# EAGLE board lightswitchboard (EAGLE 9.2.0)
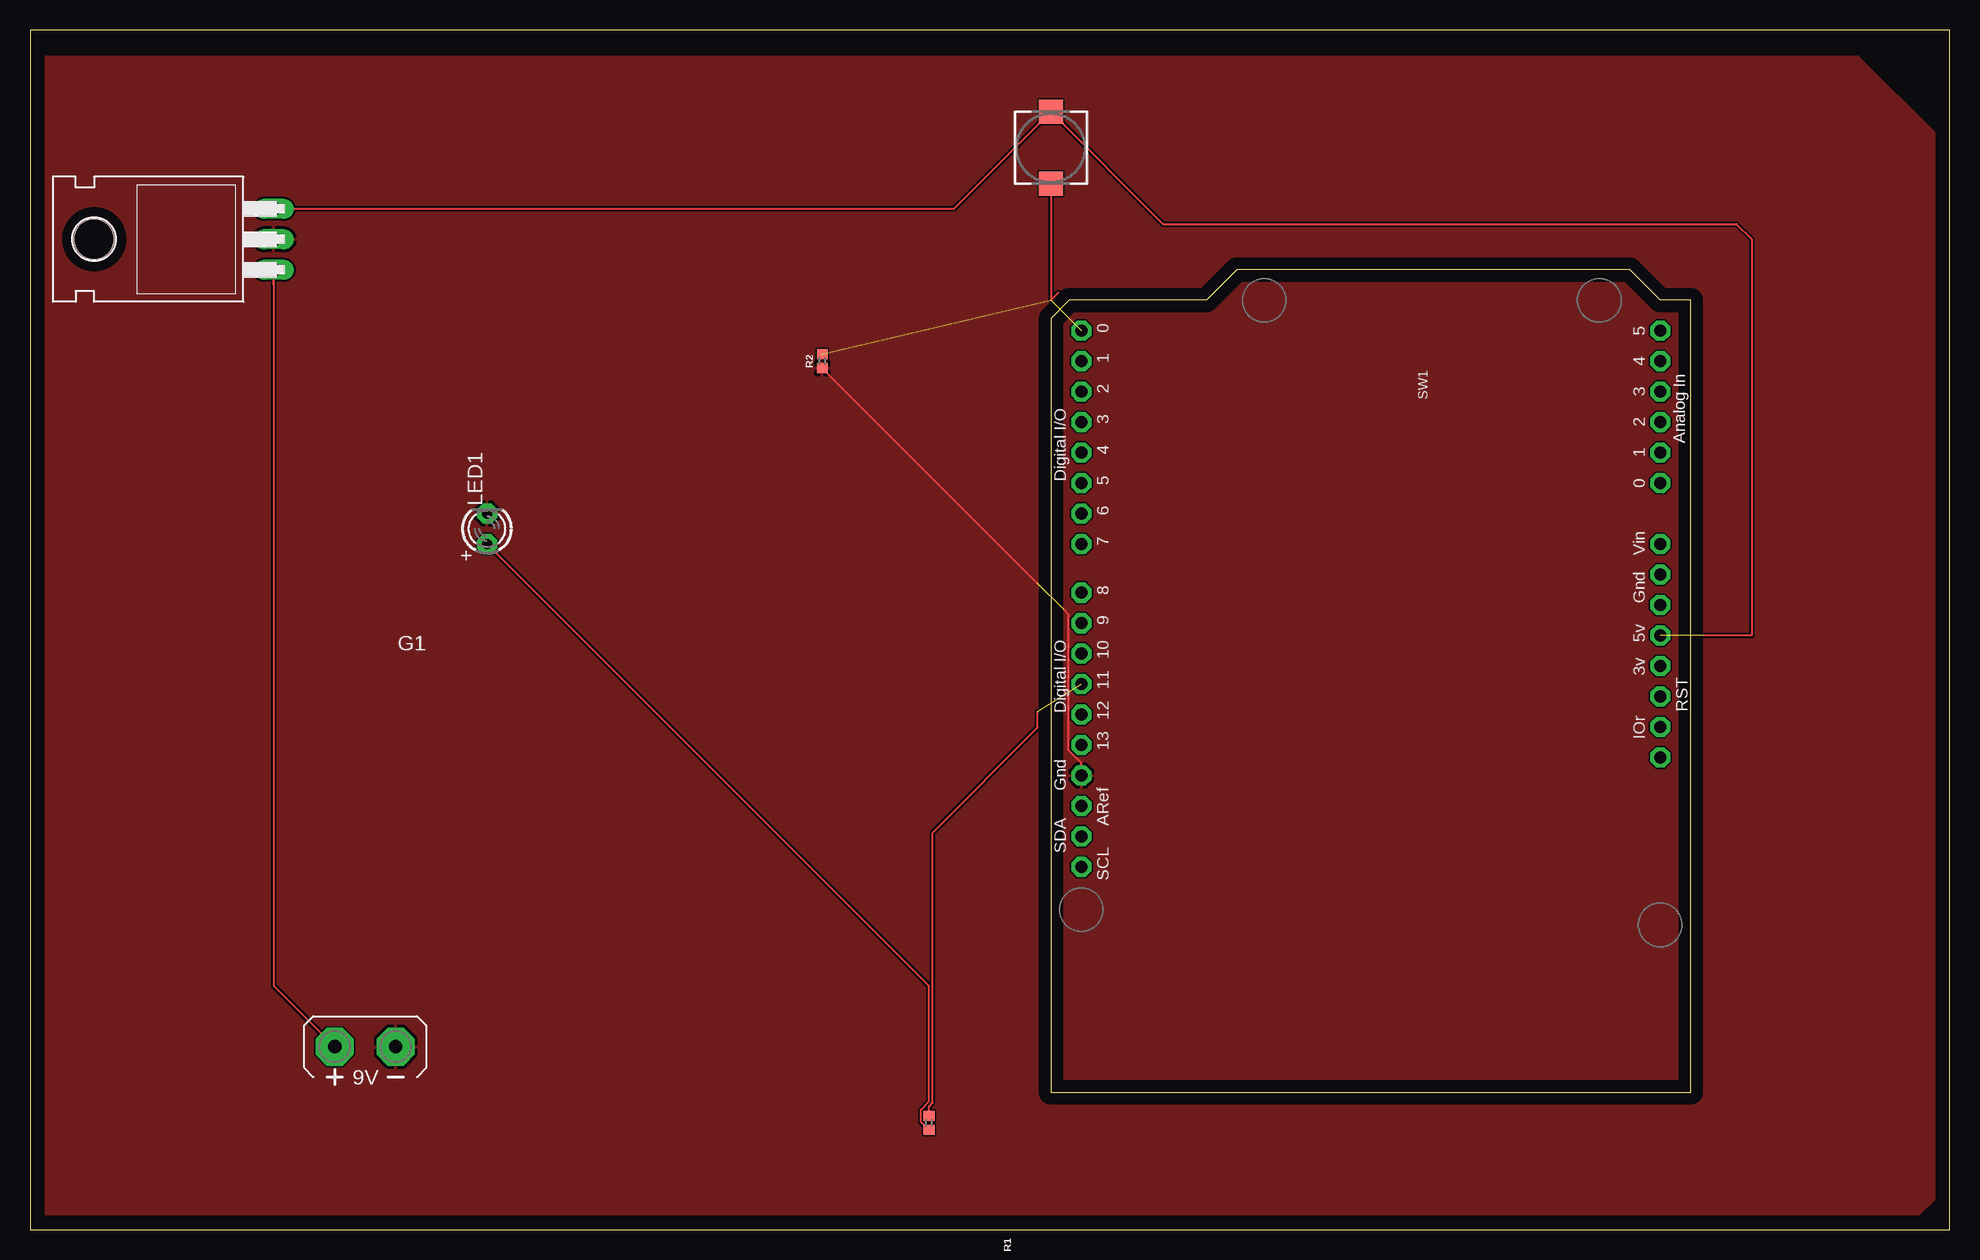
[diagram p0: board, top side]
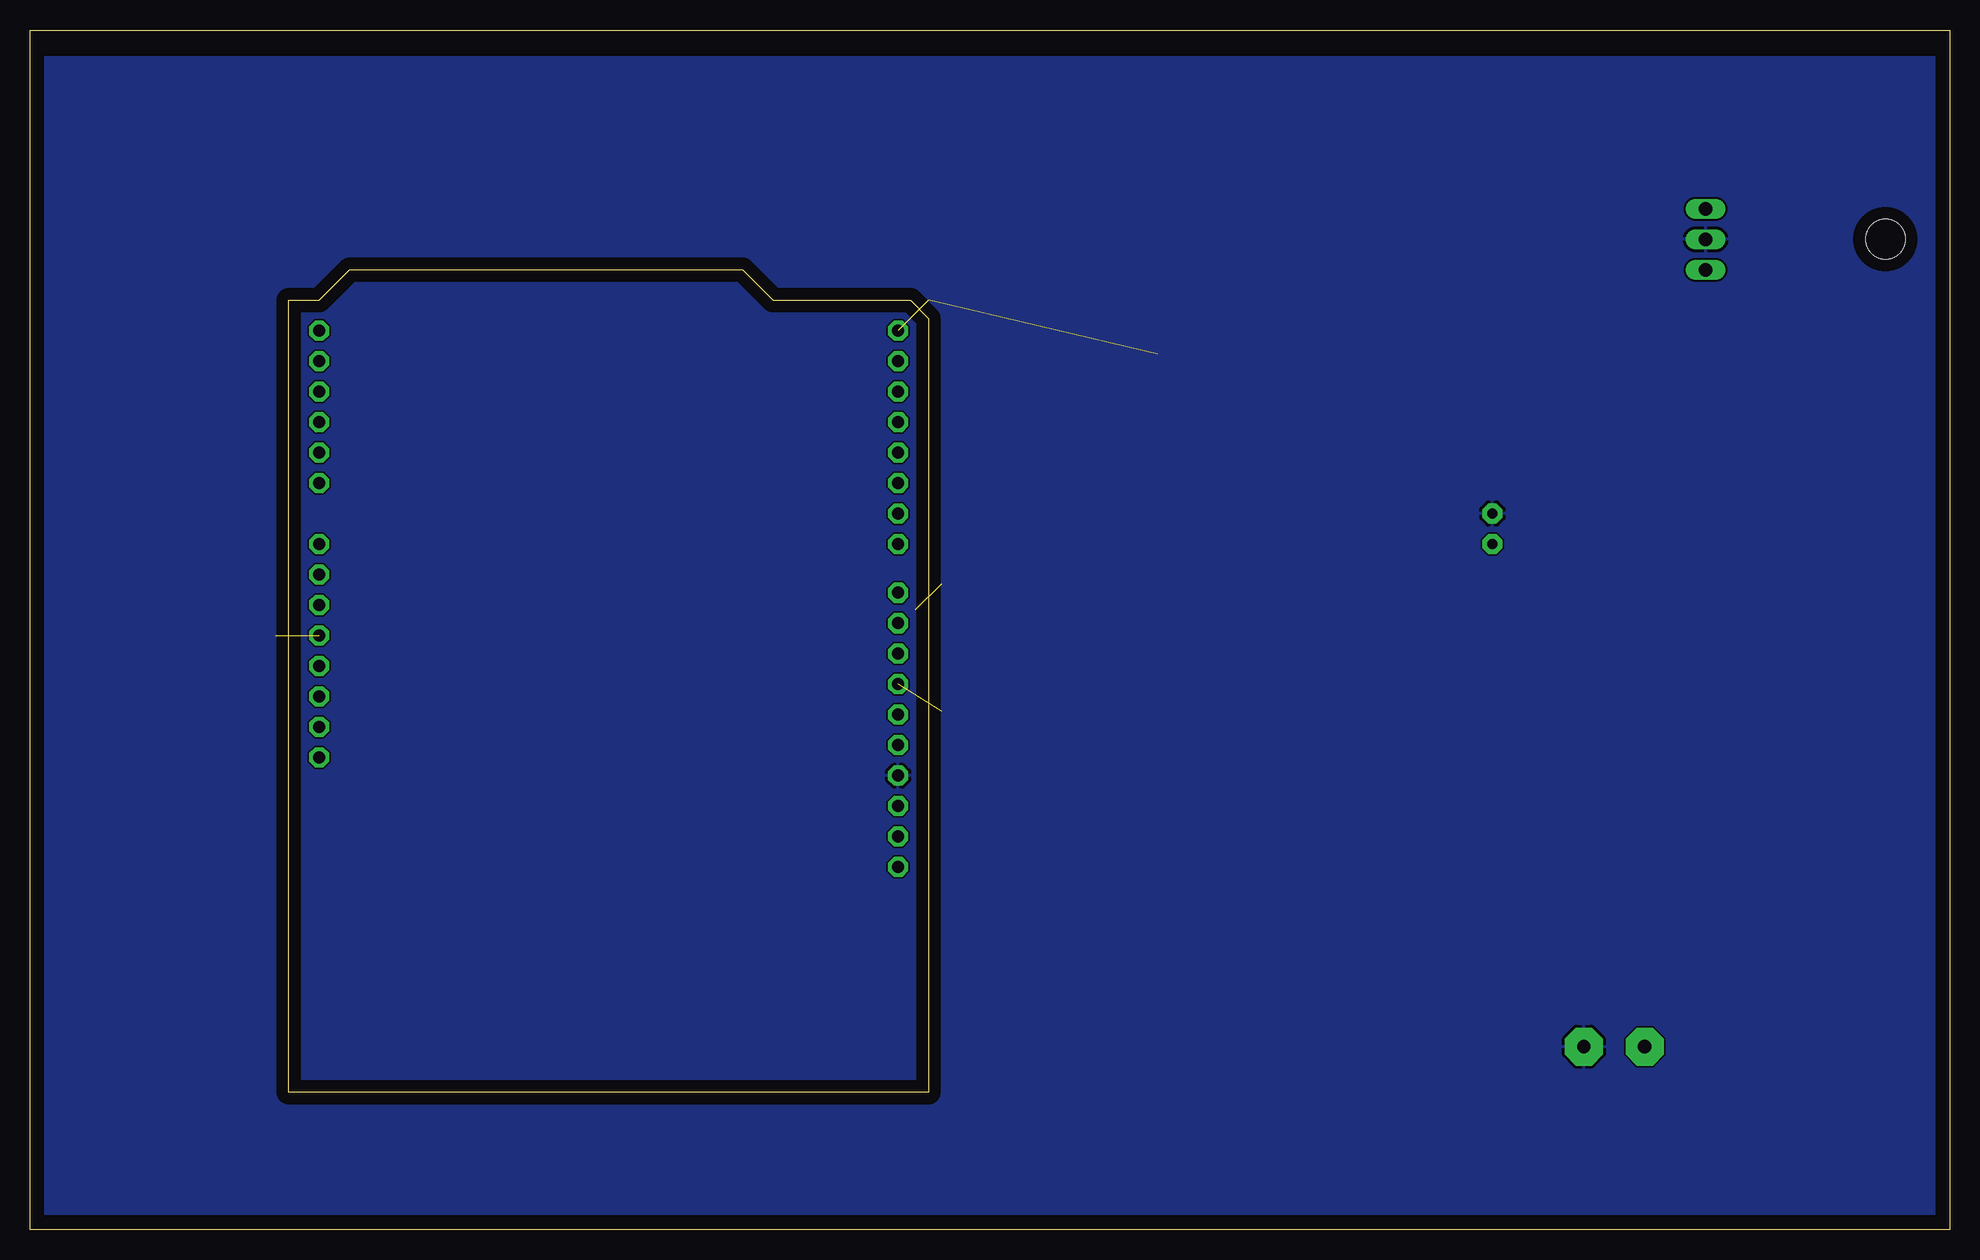
[diagram p1: board, bottom side, seen from below]

Size 160 x 100 mm. Coordinates in mm from the lower left corner, seen from the top.
Outline: 0,0 160,0 160,100 0,100 0,0
Copper layers (1*16): Top 0.035mm / dielectric 1.5mm / Bottom 0.035mm
Design rules "default": minimum track width 6mil, minimum drill 0.35mm, track to track 6mil, track to pad 6mil, pad to pad 6mil, via to via 6mil, smd to smd 6mil, copper to edge 40mil, drill to drill 6mil, minimum pad ring 10mil, minimum via ring 8mil, stop-mask expansion 4mil, vias tented up to drill 0mil, thermal gap 10mil

## Footprints (pad centres in the part's own frame; a part is rotated, then mirrored left to right if it is on the bottom)
AB9V = drill 1.118 pad 3.15 octagon: + 0,2.54; - 0,-2.54
TO220H = drill 1.118 long: 1 -2.54,-10.16; 2 0,-10.16; 3 2.54,-10.16 | hole 3.302: 0,4.826
LED3MM = drill 0.813 pad 1.676 octagon: A -1.27,0; K 1.27,0
0402 = smd 0.85 x 0.9: 1 -0.58,0; 2 0.58,0
PUSHBUTTON_SMD_SJ = smd 2 x 2: P$1 3,0; P$2 -3,0
ARDUINOR3 = drill 1 pad 1.676 octagon: 3V 35.56,2.54; 5V 38.1,2.54; A0 50.8,2.54; A1 53.34,2.54; A2 55.88,2.54; A3 58.42,2.54; A4 60.96,2.54; A5 63.5,2.54; AREF 23.876,50.8; D0 63.5,50.8; D1 60.96,50.8; D2 58.42,50.8; D3 55.88,50.8; D4 53.34,50.8; D5 50.8,50.8; D6 48.26,50.8; D7 45.72,50.8; D8 41.656,50.8; D9 39.116,50.8; D10 36.576,50.8; D11 34.036,50.8; D12 31.496,50.8; D13 28.956,50.8; GND 26.416,50.8; GND1 43.18,2.54; GND2 40.64,2.54; IOREF 30.48,2.54; RESERVED 27.94,2.54; RESET 33.02,2.54; SCL 18.796,50.8; SDA 21.336,50.8; VIN 45.72,2.54

## Placement (x,y rotation side)
G1  AB9V  [AB9V]  27.94,15.24 90 top
IC1  7805T  [TO220H]  10.16,82.55 90 top
LED1  [LED3MM]  38.1,58.42 90 top
R1  100K  [0402]  74.93,8.89 90 top
R2  100K  [0402]  66.04,72.39 90 top
SW1  [PUSHBUTTON_SMD_SJ]  85.09,90.17 270 top
U1  ARDUINOR3-DIMENSION  [ARDUINOR3]  138.43,11.43 90 top

## Library data of the parts
G1 = battery
IC1 = linear
LED1 SW1 U1 = adafruit
R1 R2 = SparkFun-Resistors; PROD_ID: RES-13495

## Nets
3V: U1.3V
+5V: IC1.3 SW1.P$2 U1.5V
GND: G1.- IC1.2 LED1.K R2.1 U1.GND
GND1: U1.GND1
GND2: U1.GND2
N$1: G1.+ IC1.1
N$4: R2.2 SW1.P$1 U1.D0
N$5: R1.2 U1.D11
N$6: LED1.A R1.1
VIN: U1.VIN

## Tracks (layer width: path | path; a pad name or v marks a point on that pad's centre or on a via)
+5V  (1 unrouted)
  Top 0.152: IC1.3 77.01,85.09 SW1.P$2 94.44,83.82 142.24,83.82 143.51,82.55 143.51,49.53 139.52,49.53
GND  (1 unrouted)
  Top 0.152: U1.GND 87.63,38.88 86.56,39.94 86.56,51.29 86.18,51.67 | R2.1 84,53.85
  pour Top: 1.27,97.79 1.27,1.27 157.48,1.27 158.75,2.54 158.75,91.44 152.4,97.79
  pour Bottom: 1.27,97.79 1.27,1.27 158.75,1.27 158.75,95.25 158.75,97.79
N$1
  Top 0.152: 20.32,78.74 IC1.1 20.32,20.32 G1.+
N$4  (2 unrouted)
  Top 0.152: SW1.P$1 85.09,77.49 85.72,78.11
N$5  (1 unrouted)
  Top 0.152: R1.2 74.93,10.24 75.23,10.54 75.23,33.07 84,41.83 84,43.18
N$6
  Top 0.152: LED1.A 74.93,20.32 74.93,10.67 74.25,9.99 74.25,8.95 74.39,8.82 74.42,8.82 R1.1